# EAGLE board Gloves Flex PCB (EAGLE 6.4)
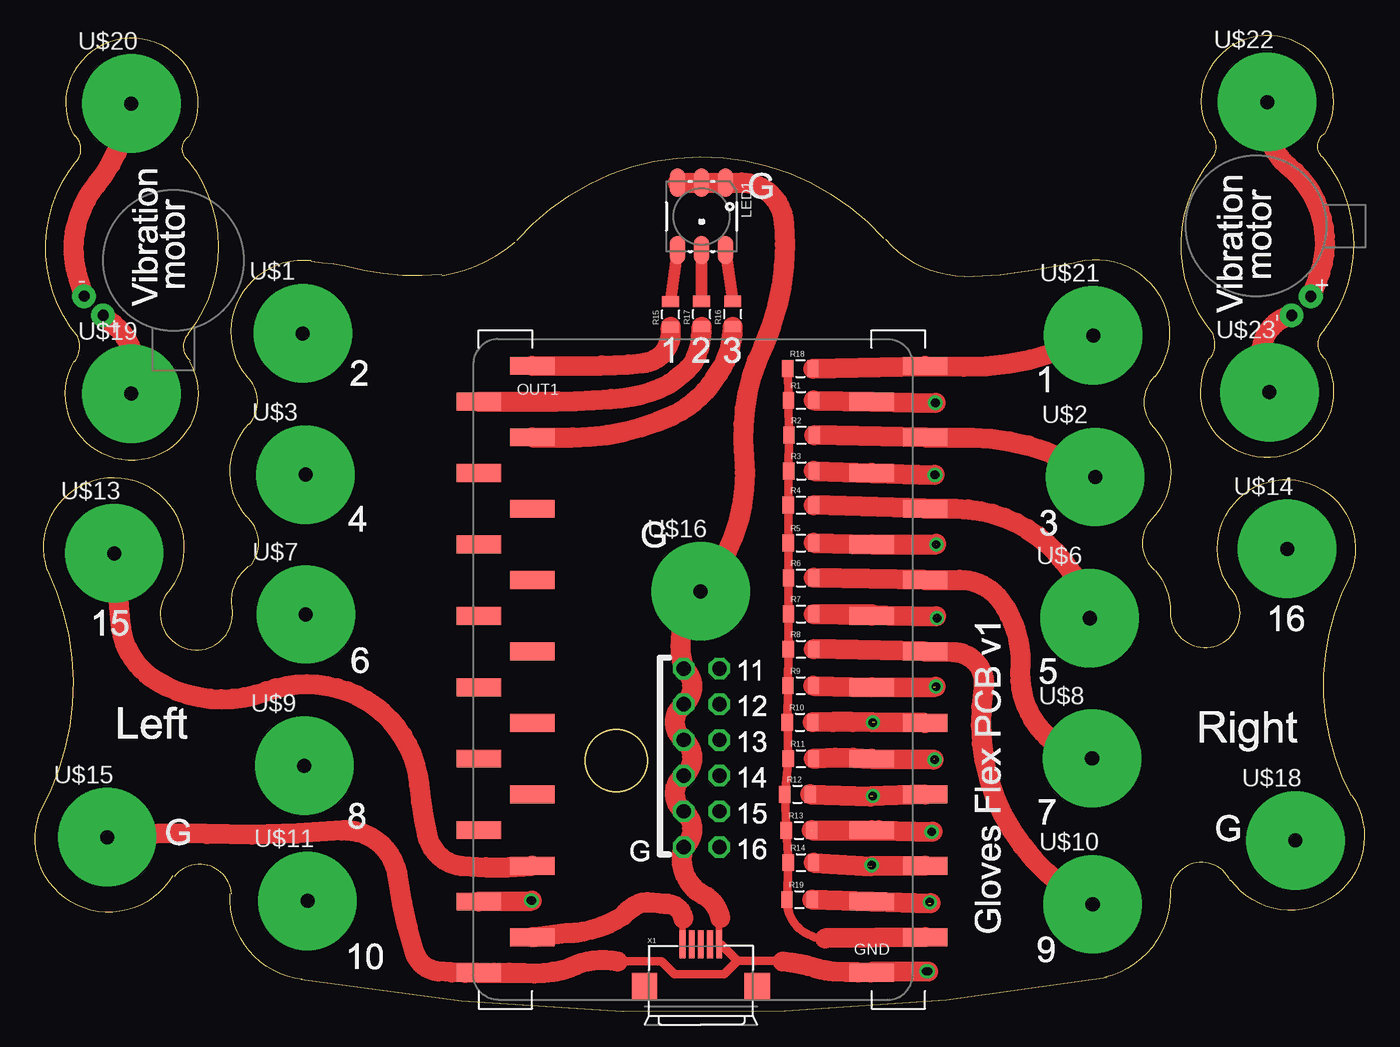
[diagram p0: board, top side]
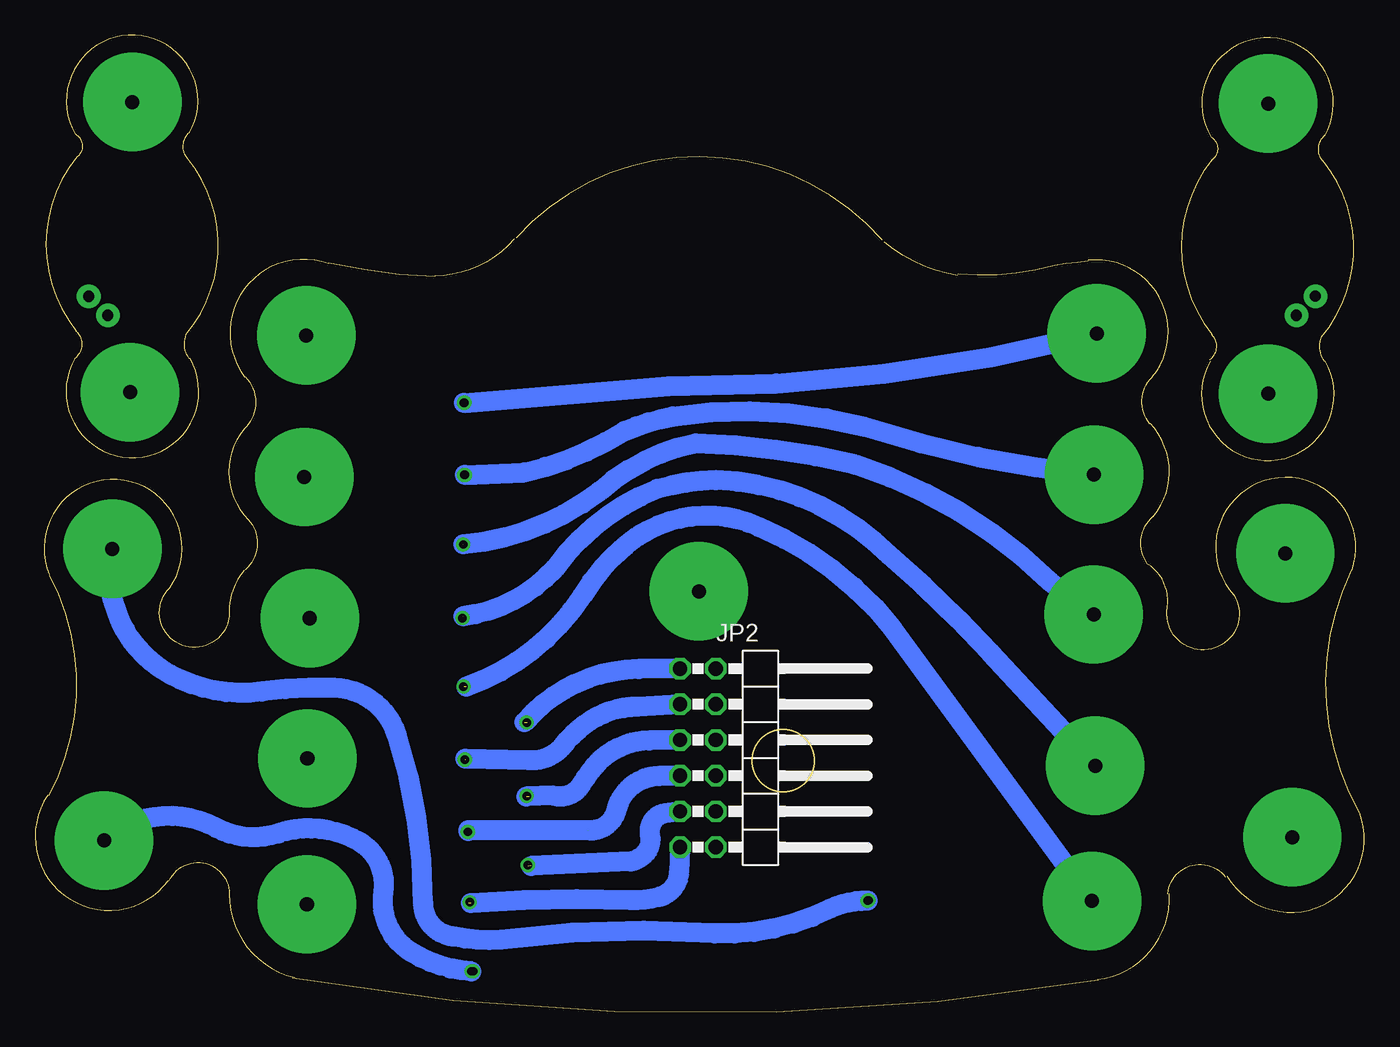
[diagram p1: board, bottom side, seen from below]

Size 94.53 x 69.46 mm. Coordinates in mm from the lower left corner, seen from the top.
Outline: 34.27,54.86 arc-97 60.33,55.01
Outline: 60.46,54.96 arc49 66.1,52.32
Outline: 66.1,52.27 arc11 73.64,53.25
Outline: 73.67,53.2 arc-147 79.62,45.14
Outline: 79.59,45.16 arc92 79.71,41.4
Outline: 79.68,41.43 arc-84 79.38,35.01
Outline: 79.39,35.01 arc92 79.61,31.43
Outline: 79.67,31.4 arc-44 80.73,28.07
Outline: 80.74,28.06 arc217 84.97,30.14
Outline: 84.96,30.13 arc-237 93.54,31.1
Outline: 93.52,31.04 arc56 93.57,15.37
Outline: 93.63,15.4 arc-178 85.04,9.35
Outline: 84.99,9.32 arc155 80.72,8.37
Outline: 80.73,8.37 arc-77 76.08,2.43
Outline: 76.21,2.4 arc-19 18.91,2.28
Outline: 18.99,2.29 arc-87 13.88,8.38
Outline: 13.97,8.37 arc138 9.87,9.58
Outline: 9.76,9.66 arc-170 0.33,14.14
Outline: 0.33,14.15 arc55 0.89,31.4
Outline: 0.87,31.4 arc-241 9.28,29.66
Outline: 9.29,29.66 arc222 14,28.75
Outline: 14,28.77 arc-65 15.38,31.82
Outline: 15.42,31.85 arc85 15.01,35.24
Outline: 15,35.22 arc-82 15.22,41.83
Outline: 15.24,41.81 arc86 15.08,45.13
Outline: 15.06,45.16 arc-135 19.62,53.44
Outline: 19.61,53.37 arc-5 22.03,53.06 arc20 28.91,52.45
Outline: 28.92,52.35 arc30 34.13,54.73
Outline: 2.81,62.28 arc-240 10.92,62.22
Outline: 10.89,62.21 arc114 10.87,60.56
Outline: 10.84,60.58 arc-77 10.85,48.21
Outline: 10.89,48.18 arc100 11.02,46.35
Outline: 10.96,46.27 arc-240 2.77,46.28
Outline: 2.82,46.25 arc57 3.03,47.98
Outline: 3.05,47.99 arc-79 2.93,60.49
Outline: 2.94,60.48 arc88 2.79,62.37
Outline: 83.56,62.47 arc-240 91.67,62.41
Outline: 91.65,62.41 arc114 91.61,60.75
Outline: 91.59,60.77 arc-77 91.6,48.4
Outline: 91.63,48.42 arc100 91.72,46.46
Outline: 91.71,46.46 arc-240 83.52,46.47
Outline: 83.57,46.44 arc57 83.78,48.17
Outline: 83.8,48.18 arc-79 83.68,60.68
Outline: 83.69,60.67 arc88 83.54,62.56
Outline: circle at 41.32,17.84 radius 2.21
Copper layers (1*16): Top 0.035mm / dielectric 1.5mm / Bottom 0.035mm
Design rules "sebDrc": minimum track width 0.15mm, minimum drill 0.3mm, track to track 0.15mm, track to pad 0.15mm, pad to pad 0.15mm, via to via 0.15mm, smd to smd 0.15mm, copper to edge 0.2mm, drill to drill 0.15mm, minimum pad ring 10mil, minimum via ring 8mil, stop-mask expansion 4mil, vias tented up to drill 1mm, thermal gap 0.15mm

## Footprints (pad centres in the part's own frame; a part is rotated, then mirrored left to right if it is on the bottom)
2X06/90 = drill 1.016 octagon: 1 -6.35,-6.35; 2 -6.35,-3.81; 3 -3.81,-6.35; 4 -3.81,-3.81; 5 -1.27,-6.35; 6 -1.27,-3.81; 7 1.27,-6.35; 8 1.27,-3.81; 9 3.81,-6.35; 10 3.81,-3.81; 11 6.35,-6.35; 12 6.35,-3.81
LED-TRICOLOR-5050 = smd 2 x 1.1: 1 -2.4,1.7; 2 -2.4,0; 3 -2.4,-1.7; 4 2.4,-1.7; 5 2.4,0; 6 2.4,1.7
0805 = smd 0.8 x 1.2: 1 -0.9,0; 2 0.9,0
SNAP-PAD_7MM_RD = drill 1 pad 7: P$1 0,0
X-OSC_SMD = smd 3.17 x 1.27: GND 12.7,-21.59; GND@1 -15.24,-21.59; IN1 16.51,21.59; IN2 12.7,19.05; IN3 16.51,16.51; IN4 12.7,13.97; IN5 16.51,11.43; IN6 12.7,8.89; IN7 16.51,6.35; IN8 12.7,3.81; IN9 16.51,1.27; IN10 12.7,-1.27; IN11 16.51,-3.81; IN12 12.7,-6.35; IN13 16.51,-8.89; IN14 12.7,-11.43; IN15 16.51,-13.97; IN16 12.7,-16.51; OUT1 -11.43,21.59; OUT2 -15.24,19.05; OUT3 -11.43,16.51; OUT4 -15.24,13.97; OUT5 -11.43,11.43; OUT6 -15.24,8.89; OUT7 -11.43,6.35; OUT8 -15.24,3.81; OUT9 -11.43,1.27; OUT10 -15.24,-1.27; OUT11 -11.43,-3.81; OUT12 -15.24,-6.35; OUT13 -11.43,-8.89; OUT14 -15.24,-11.43; OUT15 -11.43,-13.97; OUT16 -15.24,-16.51; VBATT -11.43,-19.05; VOUT 16.51,-19.05
VIBE-MOTOR-10MM = drill 0.8 pad 1.676: + -5,-3.9; - -6.35,-2.54
USB-MICROB = smd 0.4 x 2: D+ 0,3.1; D- -0.65,3.1; GND 1.3,3.1; ID 0.65,3.1; VBUS -1.3,3.1 | smd 1.8 x 1.9: GND@2 -4,0.15; GND@3 4,0.15

## Placement (x,y rotation side)
JP2  [2X06/90]  42.32,18.06 270 bottom
LED1  LED-TRICOLOR-5050NO_IC  [LED-TRICOLOR-5050]  47.39,56.56 270 top
R1  [0805]  54.48,43.48 0 top
R2  [0805]  54.51,41 0 top
R3  [0805]  54.49,38.46 0 top
R4  [0805]  54.46,36.03 0 top
R5  [0805]  54.46,33.34 0 top
R6  [0805]  54.48,30.85 0 top
R7  [0805]  54.48,28.29 0 top
R8  [0805]  54.46,25.79 0 top
R9  [0805]  54.45,23.19 0 top
R10  [0805]  54.39,20.59 0 top
R11  [0805]  54.46,18 0 top
R12  [0805]  54.22,15.46 0 top
R13  [0805]  54.33,12.9 0 top
R14  [0805]  54.46,10.6 0 top
R15  [0805]  45.19,49.6 90 top
R16  [0805]  49.62,49.63 90 top
R17  [0805]  47.4,49.63 90 top
R18  [0805]  54.43,45.74 0 top
R19  [0805]  54.36,7.98 0 top
U$1  SNAP-PAD_7MM_ROUND  [SNAP-PAD_7MM_RD]  19.03,48.24 0 top
U$2  SNAP-PAD_7MM_ROUND  [SNAP-PAD_7MM_RD]  75.4,38.03 0 top
U$3  SNAP-PAD_7MM_ROUND  [SNAP-PAD_7MM_RD]  19.23,38.2 0 top
U$4  X-OSC  [X-OSC_SMD]  46.78,24.34 0 top
U$5  [GLOVES_FLEX_PCB_V1]  -2.63,-0.28 0 top
U$6  SNAP-PAD_7MM_ROUND  [SNAP-PAD_7MM_RD]  75.01,27.99 0 top
U$7  SNAP-PAD_7MM_ROUND  [SNAP-PAD_7MM_RD]  19.25,28.25 0 top
U$8  SNAP-PAD_7MM_ROUND  [SNAP-PAD_7MM_RD]  75.17,18.02 0 top
U$9  SNAP-PAD_7MM_ROUND  [SNAP-PAD_7MM_RD]  19.14,17.49 0 top
U$10  SNAP-PAD_7MM_ROUND  [SNAP-PAD_7MM_RD]  75.21,7.64 0 top
U$11  SNAP-PAD_7MM_ROUND  [SNAP-PAD_7MM_RD]  19.38,7.87 0 top
U$12  MOTOR10MM  [VIBE-MOTOR-10MM]  86.83,55.88 90 top
U$13  SNAP-PAD_7MM_ROUND  [SNAP-PAD_7MM_RD]  5.62,32.6 0 top
U$14  SNAP-PAD_7MM_ROUND  [SNAP-PAD_7MM_RD]  89.04,32.92 0 top
U$15  SNAP-PAD_7MM_ROUND  [SNAP-PAD_7MM_RD]  5.12,12.4 0 top
U$16  SNAP-PAD_7MM_ROUND  [SNAP-PAD_7MM_RD]  47.32,29.9 0 top
U$17  MOTOR10MM  [VIBE-MOTOR-10MM]  9.83,53.44 0 top
U$18  SNAP-PAD_7MM_ROUND  [SNAP-PAD_7MM_RD]  89.63,12.18 0 top
U$19  SNAP-PAD_7MM_ROUND  [SNAP-PAD_7MM_RD]  6.85,43.95 0 top
U$20  SNAP-PAD_7MM_ROUND  [SNAP-PAD_7MM_RD]  6.84,64.59 0 top
U$21  SNAP-PAD_7MM_ROUND  [SNAP-PAD_7MM_RD]  75.25,48.1 0 top
U$22  SNAP-PAD_7MM_ROUND  [SNAP-PAD_7MM_RD]  87.62,64.7 0 top
U$23  SNAP-PAD_7MM_ROUND  [SNAP-PAD_7MM_RD]  87.78,44.06 0 top
X1  USB-MICROB  [USB-MICROB]  47.34,1.68 0 top

## Library data of the parts
JP2 = pinhead
LED1 = SparkFun-LED
R1-R19 = SparkFun-Passives
U$1-U$3 U$5-U$11 U$13-U$16 U$18-U$23 = hannahsEagleLib
U$4 = x-io
U$12 U$17 = SparkFun-Electromechanical
X1 = SparkFun

## Nets
GND: JP2.2 JP2.4 JP2.6 JP2.8 JP2.10 JP2.12 LED1.1 LED1.2 LED1.3 U$4.GND U$4.GND@1 U$15.P$1 U$16.P$1 U$18.P$1 X1.GND
N$1: LED1.6 R16.2
N$2: LED1.4 R15.2
N$3: R16.1 U$4.OUT3
N$4: R1.2 U$1.P$1 U$4.IN2
N$6: R2.2 U$2.P$1 U$4.IN3
N$7: R3.2 U$3.P$1 U$4.IN4
N$8: R4.2 U$4.IN5 U$6.P$1
N$9: R5.2 U$4.IN6 U$7.P$1
N$12: R6.2 U$4.IN7 U$8.P$1
N$13: R7.2 U$4.IN8 U$9.P$1
N$14: R8.2 U$4.IN9 U$10.P$1
N$15: R9.2 U$4.IN10 U$11.P$1
N$16: JP2.1 R10.2 U$4.IN11
N$17: LED1.5 R17.2
N$18: JP2.3 R11.2 U$4.IN12
N$19: JP2.5 R12.2 U$4.IN13
N$20: JP2.7 R13.2 U$4.IN14
N$21: JP2.9 R14.2 U$4.IN15
N$22: JP2.11 R19.2 U$4.IN16
N$23: U$4.OUT15 U$13.P$1
N$24: U$4.OUT16 U$14.P$1
N$25: R17.1 U$4.OUT2
N$26: R15.1 U$4.OUT1
N$29: U$12.+ U$22.P$1
N$30: U$12.- U$23.P$1
N$33: U$4.VBATT X1.VBUS
N$38: U$17.+ U$19.P$1
N$40: R18.2 U$4.IN1 U$21.P$1
N$46: U$17.- U$20.P$1
N$58: R1.1 R2.1 R3.1 R4.1 R5.1 R6.1 R7.1 R8.1 R9.1 R10.1 R11.1 R12.1 R13.1 R14.1 R18.1 R19.1 U$4.VOUT

## Tracks (layer width: path | path; a pad name or v marks a point on that pad's centre or on a via)
GND  (via drill 0.6)
  Top 0.406: 59.6,2.87 arc90 U$4.GND arc-90 59.46,2.73
  Top 0.45: 48.76,4.78 X1.GND 48.64,6.56
  Top 0.61: 41.44,3.57 44.55,3.57 45.45,2.67 48.99,2.67 49.93,3.61 | 49.93,3.61 53.13,3.61 53.18,3.56 | 48.76,4.78 49.93,3.61 | 48.64,6.56 48.73,6.65
  Top 0.813: 59.46,2.73 arc90 59.41,2.78
  Top 1.422: LED1.3 LED1.2 | LED1.2 LED1.1 | LED1.2 50.26,58.97 arc-87 53.24,56.05 arc-29 51.79,47.34 arc32 50.42,39.46 arc-47 U$16.P$1 arc58 JP2.2 arc-105 JP2.4 arc105 JP2.6 arc-105 JP2.8 arc105 JP2.10 arc-105 JP2.12 arc83 47.75,8.18 arc-45 48.73,6.65 | U$15.P$1 arc-9 12.2,12.63 arc7 21.82,12.88 arc-86 25.8,9.53 arc9 26.98,4.23 arc68 28.66,2.86 arc6 U$4.GND@1 arc-2 34.79,2.75 arc18 37.54,2.97 arc8 38.85,3.47 arc-28 41.44,3.57 | 59.6,2.87 v63.5,2.87 | 59.41,2.78 arc-3 56.8,2.85 arc-15 55.55,3.08 arc13 53.18,3.56
  Bottom 1.422: v63.5,2.87 arc29 67.78,4.23 arc67 69.75,8.51 arc-68 71.44,12.06 arc-49 77.24,12.68 arc47 81.63,13.07 arc-70 U$18.P$1
N$1
  Top 0.813: LED1.6 R16.2
N$2
  Top 0.813: R15.2 LED1.4
N$3
  Top 1.422: U$4.OUT3 38.22,40.85 arc25 45.4,42.45 arc33 48.3,45.01 arc40 R16.1
N$4  (via drill 0.6)
  Top 1.422: v64.03,43.3 U$4.IN2 R1.2
  Bottom 1.422: v64.03,43.3 49.5,44.48 arc-15 U$1.P$1
N$5  (via drill 0.6)
  other vias: 63.97,17.93
N$6
  Top 1.422: U$2.P$1 arc34 66.66,40.82 U$4.IN3 R2.2
N$7  (via drill 0.6)
  Top 1.422: v63.97,38.18 U$4.IN4 R3.2
  Bottom 1.422: v63.97,38.18 59.74,38.35 arc-20 52.61,41.3 arc12 49.19,42.34 arc23 35.55,41.61 arc-12 U$3.P$1
N$8
  Top 1.422: U$6.P$1 arc78 65.48,35.77 U$4.IN5 R4.2
N$9  (1 unrouted)
  Top 1.422: 64.09,33.29 64.09,33.23 U$4.IN6 R5.2
  Bottom 1.422: U$7.P$1 22.39,30.6 arc-27 36.24,38.9 arc-12 47.56,40.42 arc-30 54.4,37.01 arc33 64.09,33.23
N$12
  Top 1.422: U$8.P$1 arc-88 70.08,24.69 arc37 68.65,29.24 arc60 65.41,30.7 U$4.IN7 R6.2
N$13  (1 unrouted)
  Top 1.422: U$4.IN8 59.48,28.29 R7.2 64.09,28.11
  Bottom 1.422: U$9.P$1 26.58,25.53 arc-7 33.78,32.45 arc-43 46.11,37.81 arc-13 50.28,37.19 arc-32 57.6,31.5 arc40 64.09,28.11
N$14
  Top 1.422: U$10.P$1 arc-73 67.44,23 arc99 65.29,25.58 U$4.IN9 R8.2
N$15  (1 unrouted)
  Top 1.422: 64.04,23.1 U$4.IN10 R9.2
  Bottom 1.422: U$11.P$1 33.55,27.24 arc-29 43.04,34.47 arc-58 51.64,33.82 arc-24 55.61,29.6 arc37 63.88,23.1
N$16  (1 unrouted)
  Top 1.422: U$4.IN11 59.54,20.59 arc2 R10.2
  Bottom 1.422: JP2.1 51.61,24.36 arc-48 59.73,20.59
N$17
  Top 0.813: R17.2 LED1.5
N$18  (1 unrouted)
  Top 1.422: 63.9,17.94 U$4.IN12 arc8 55.58,18.01 R11.2
  Bottom 0.406: 63.94,17.99 63.94,17.93
  Bottom 1.422: JP2.3 51.66,21.69 arc-37 55.46,20.41 arc-7 56.76,19.23 arc63 59.44,17.88 63.94,17.99
N$19  (1 unrouted)
  Top 1.422: U$4.IN13 59.41,15.3 R12.2
  Bottom 1.422: JP2.5 50.86,19.29 arc-49 54.75,17.46 arc-10 55.69,16.15 arc75 57.67,15.37 59.6,15.31
N$20  (1 unrouted)
  Top 1.422: U$4.IN14 60,12.9 | 60,12.9 63.83,12.79 | R13.2 60,12.9
  Bottom 1.422: JP2.7 50.15,16.76 arc-76 53.2,14.32 arc83 R13.2 63.72,12.9 63.72,12.85
N$21  (1 unrouted)
  Top 1.422: U$4.IN15 59.47,10.35 R14.2
  Bottom 1.422: JP2.9 49.7,14.11 arc-95 50.8,12.56 arc60 51.26,11.13 arc33 52.18,10.68 59.25,10.37
N$22  (1 unrouted)
  Top 1.422: 63.7,7.71 U$4.IN16 R19.2
  Bottom 1.422: JP2.11 48.74,9.9 arc73 50.16,8.15 arc17 52.22,7.93 arc-7 63.54,7.72
N$23
  Top 1.422: U$13.P$1 6.05,27.65 arc54 8.64,23.51 arc51 16.43,22.78 arc-40 22.19,22.78 arc-65 27.3,16.12 arc8 27.87,12.55 arc40 28.92,10.92 arc33 30.38,10.36 arc9 U$4.OUT15
N$24  (via drill 0.6)
  Top 1.422: U$4.OUT16 v35.33,7.89
  Bottom 1.422: v35.33,7.89 arc-26 37.98,7.32 arc29 46.2,5.56 arc-12 61.36,5.11 arc15 64.85,5.35 arc82 66.93,7.72 arc-17 68.79,19.66 arc-71 73.3,23.04 arc-9 78.42,22.76 arc37 84.96,24 arc73 U$14.P$1
N$25
  Top 1.422: U$4.OUT2 37.15,43.4 arc6 40.97,43.59 arc27 45.13,44.69 arc16 46.77,46.11 arc31 R17.1
N$26
  Top 1.422: U$4.OUT1 40.29,45.96 arc6 43.11,46.13 arc90 45.22,48.35 R15.1
N$29
  Top 1.422: U$12.+ 91.19,51.99 arc74 89.1,60.14 arc-62 U$22.P$1
N$30
  Top 1.422: U$23.P$1 87.28,46.27 arc-91 U$12.-
N$31  (via drill 0.6)
  other vias: 64,43.32
N$32  (via drill 0.6)
  other vias: 64,38.18
N$33
  Top 0.45: X1.VBUS 46.04,6.55
  Top 0.61: 46.04,6.55 46.1,6.61
  Top 1.422: U$4.VBATT 37.77,5.59 arc32 41.82,6.83 arc-31 43.18,7.77 arc-14 44.64,7.67 arc-90 46.1,6.61
N$38
  Top 1.422: U$17.+ 5.56,48.91 arc-70 U$19.P$1
N$40
  Top 1.422: U$21.P$1 arc-29 66.02,45.88 U$4.IN1 R18.2
N$46
  Top 1.422: U$17.- 3.09,52.1 arc-57 4.35,58.82 arc31 U$20.P$1
N$47  (via drill 0.6)
  other vias: 59.57,20.57
N$48  (via drill 0.6)
  other vias: 64.09,33.23
N$49  (via drill 0.6)
  other vias: 64.14,28
N$50  (via drill 0.6)
  other vias: 64.07,23.13
N$51  (via drill 0.6)
  other vias: 59.57,15.34
N$52  (via drill 0.6)
  other vias: 59.49,10.42
N$53  (via drill 0.6)
  other vias: 63.76,12.79
N$54  (via drill 0.6)
  other vias: 63.63,7.78
N$55  (via drill 0.6)
  other vias: 63.38,2.87
N$56  (via drill 0.6)
  other vias: 35.26,7.92
N$58
  Top 0.61: R18.1 R1.1 R2.1 R3.1 R4.1 R5.1 R6.1 R7.1 R8.1 R9.1 R10.1 R11.1 R12.1 R13.1 R14.1 R19.1 53.46,7.92 arc90 56.17,5.2
  Top 1.422: U$4.VOUT 56.17,5.2

## Text on the board
_tsilk: G | motor | motor | Vibration | Vibration | 1 | 2 | 3 | 2 | 1 | 4 | 3 | G | 15 | 16 | 6 | 11 | 5 | 12 | Left | 13 | Right | 14 | 15 | 7 | 8 | G | G | G | 16 | Gloves Flex PCB v1 | 9 | 10
200bmp: C:/Users/Perner/Desktop/HannahStuff/Gloves_x-OSC_ltBMP8004.bmp